# Altium PCB WC_Board_Backup2.PcbDoc
Units mil, origin at the board's own origin, x right, y up, seen from the top; angles counter-clockwise.
Board outline 3210 x 2580 mil, 2 copper layers (Top Layer, Bottom Layer); 45 components, 46 nets, 220 pads, 7 vias.
Unrouted connection lines stored in the file: 2.
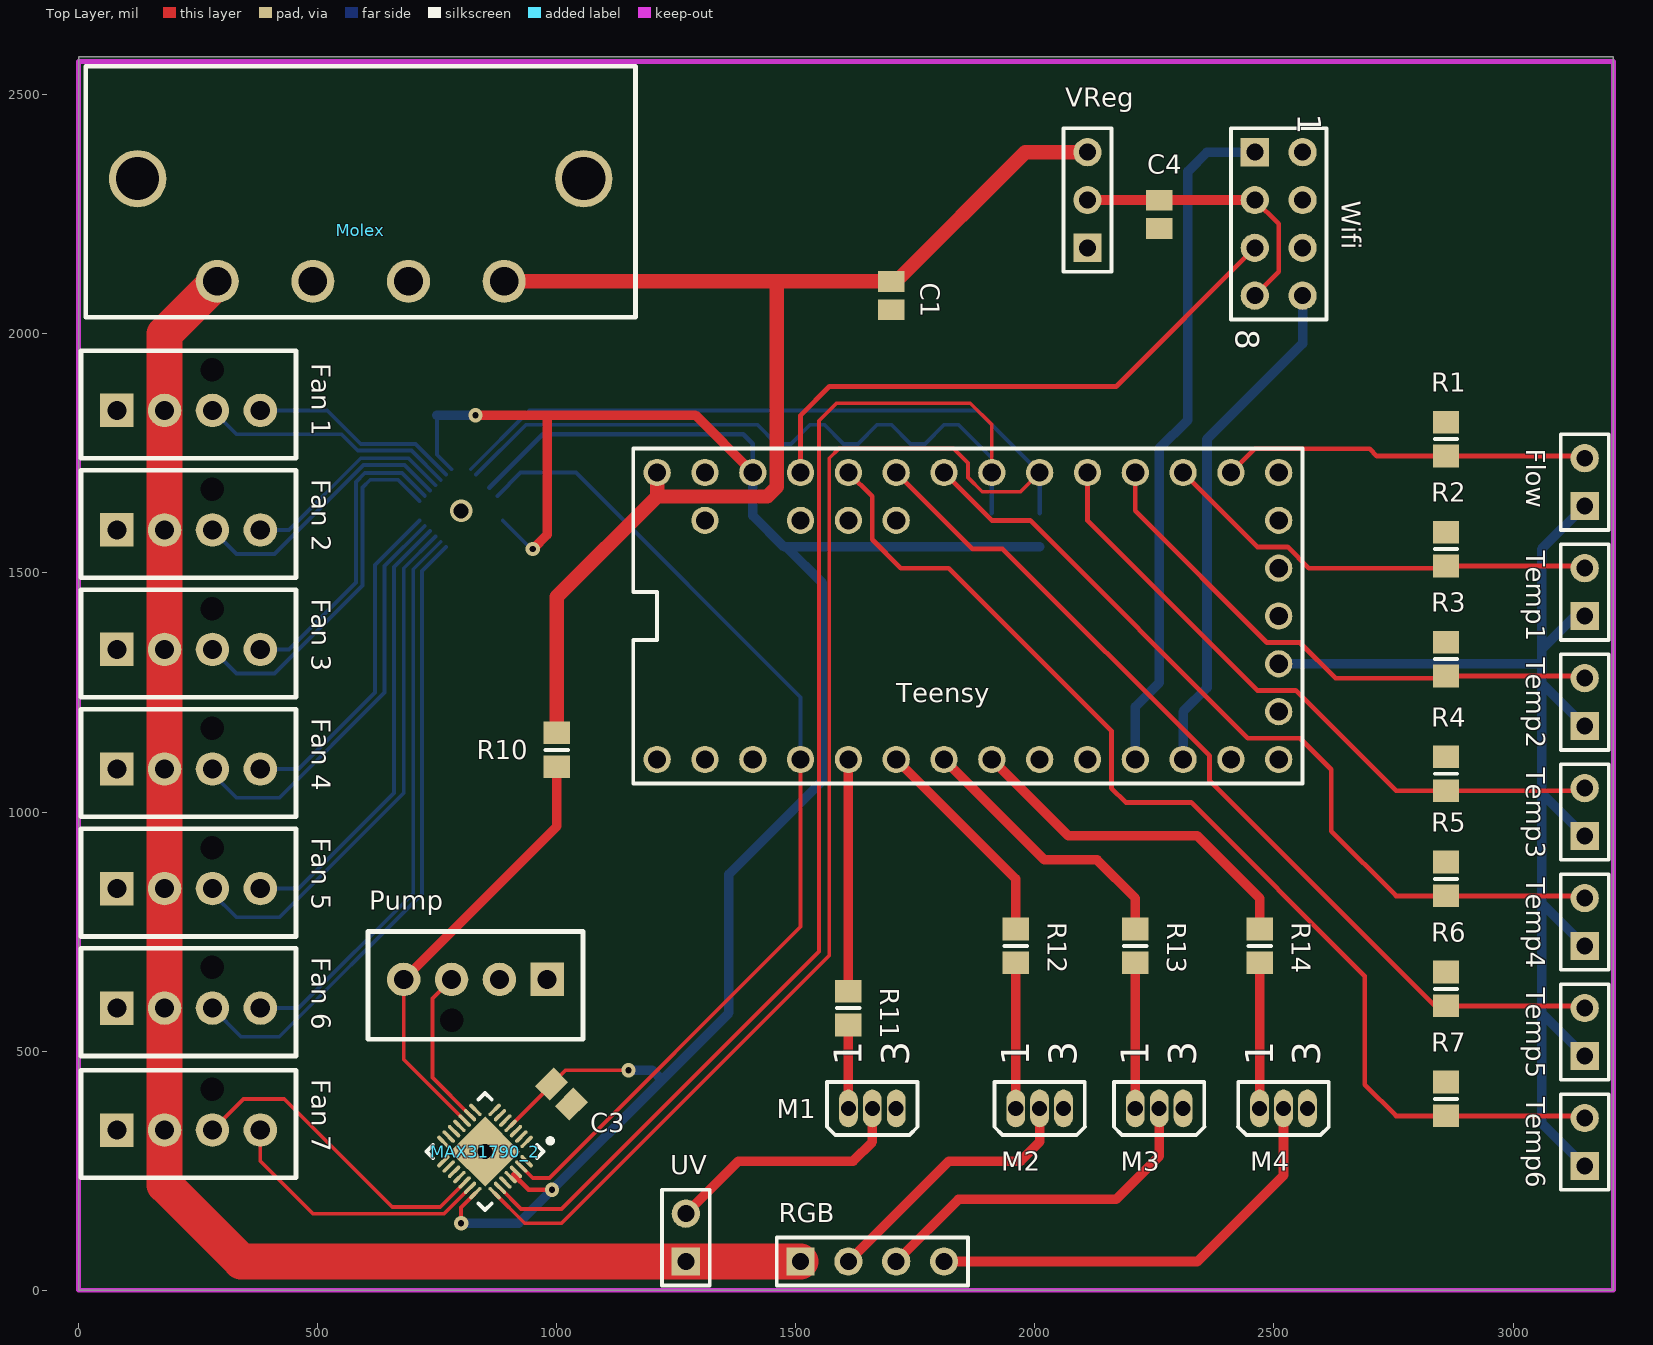
[diagram p0: Top Layer view]
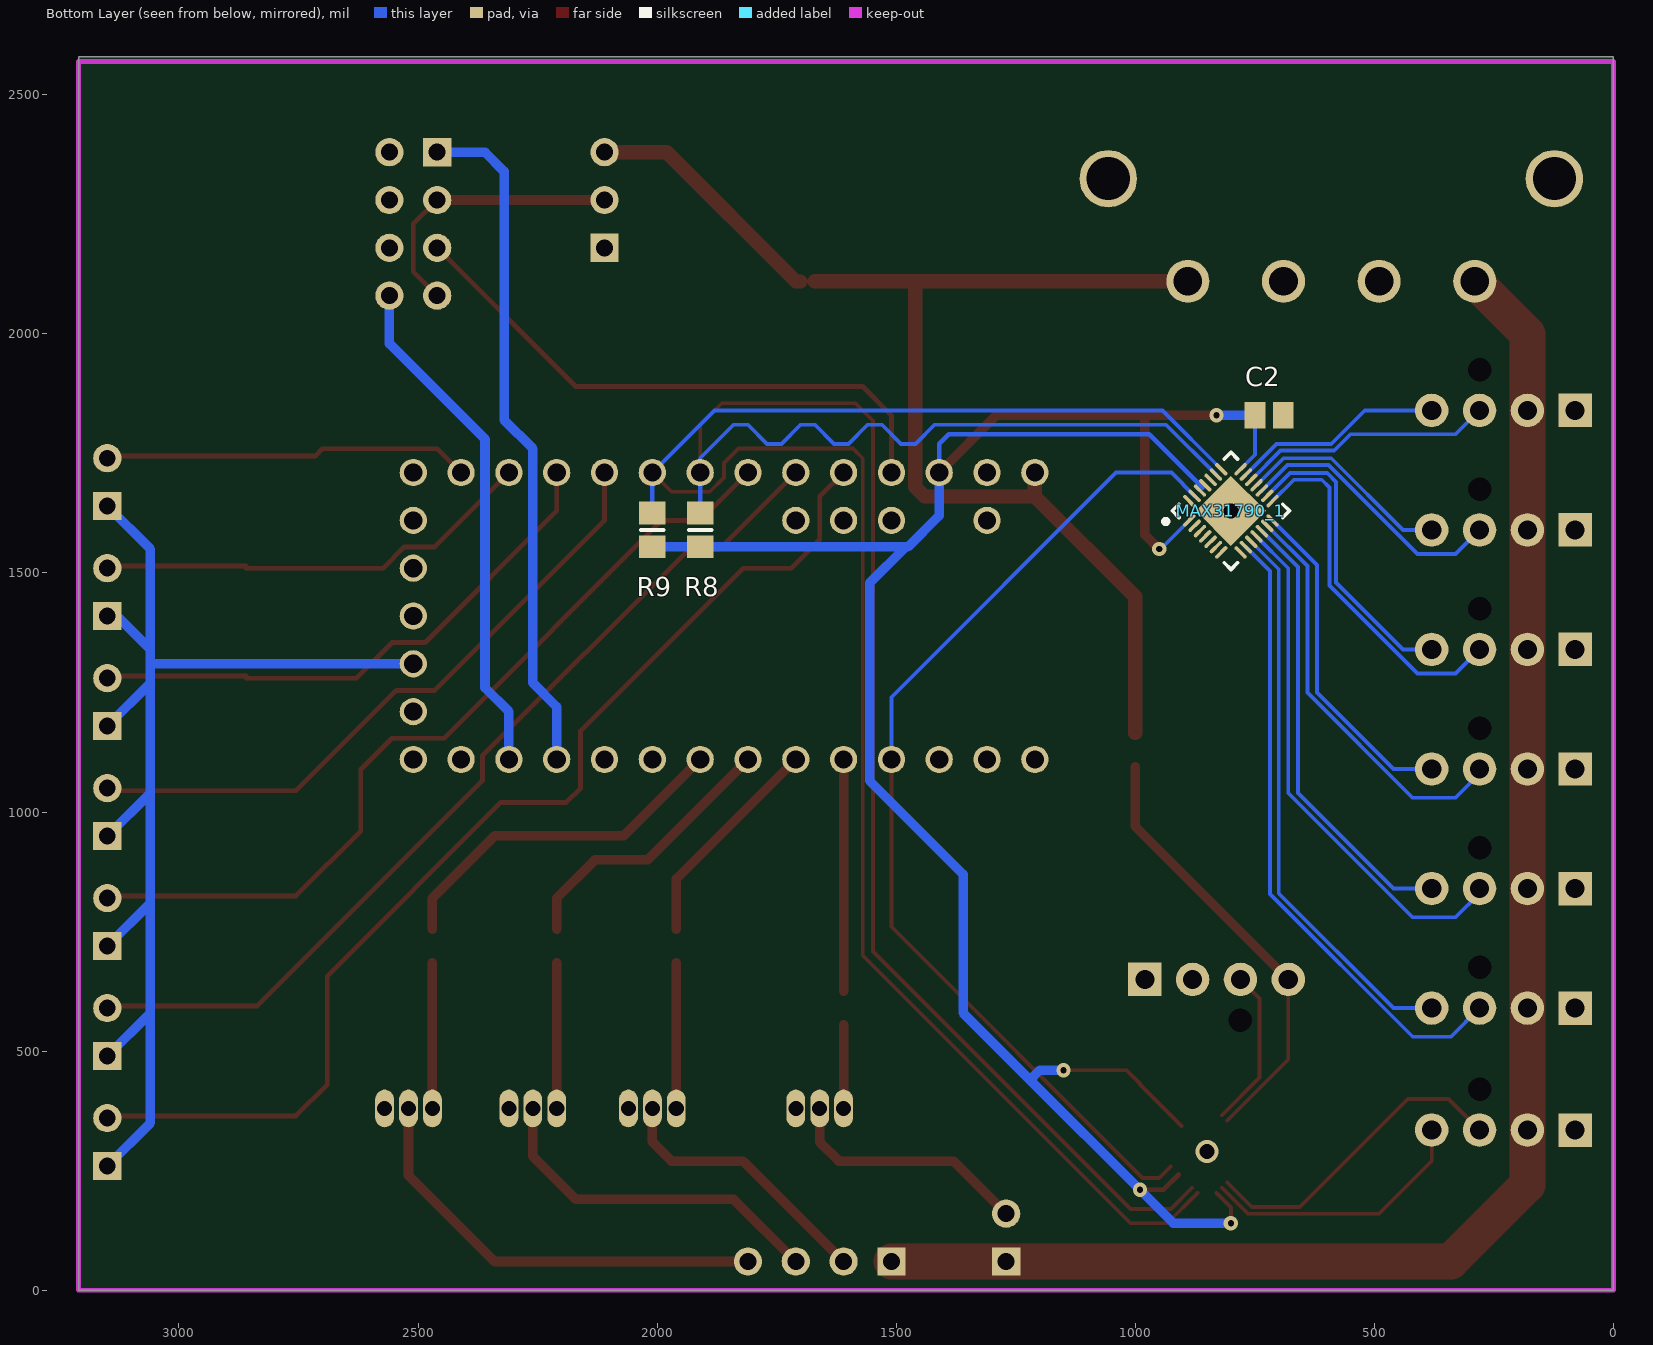
[diagram p1: Bottom Layer view, seen from below]

## Layer stack, top to bottom
Top Solder: solder mask 0.4, Solder Resist, Dk 3.5
Top Layer: signal copper 1.4
Dielectric1: dielectric 12.6, FR-4, Dk 4.8
Bottom Layer: signal copper 1.4
Bottom Solder: solder mask 0.4, Solder Resist, Dk 3.5

## Board outline
0,0 0,2580 3210,2580 3210,0

## Design rules (kind name [scope] priority, off if disabled: settings)
BoardOutlineClearance [All] p1: gap=15
Clearance [All] p1: gap=6
FabricationTestPointUsage TestPointUsage [All] p1: valid=0 allowmultiple=FALSE
FabricationTestpoint Testpoint [All] p1: side=3 testpointundercomponent=TRUE minsize=40 maxsize=100 preferedsize=60 minholesize=0 maxholesize=40 preferedholesize=32 testpointgrid=1 allowsidetop=TRUE allowsidebottom=TRUE usegrid=TRUE gridtolerance=0.01
HoleSize [All] p1: absolutevalues=TRUE maxlimit=100 minlimit=13 maxpercent=80.000 minpercent=20.000
MinimumAnnularRing [All] p1: minimumring=7
PolygonConnect [All] p1: connectstyle=Relief reliefconductorwidth=10 reliefentries=4 polygonreliefangle="90 Angle" airgapwidth=10
RoomDefinition WC_Board [InComponentClass('WC_Board')] p1: confinementstyle=ConfineIn formatcopy=TRUE lockcomponents=FALSE outline 0,0 3210,0 3210,2570 0,2570
RoutingVias [All] p1: holewidth=28 width=50 viastyle="Through Hole" minholewidth=13 minwidth=50 maxholewidth=28 maxwidth=50
SilkToSolderMaskClearance SilkscreenOverComponentPads [IsPad] p1: minsilkscreentomaskgap=10 clearancetoexposedcopper=TRUE
SolderMaskExpansion [All] p1: expansion=4
Width [All] p1: maxlimit=100 minlimit=6 preferedwidth=8
26 further rules are at their usual default settings.

## Components (designator, comment, footprint, x,y, rotation, side; value= is the part's Value field where it differs from the comment)
C1 "Cap Semi" C0805 1700,2080 r270 top
C2 "Cap Semi" C0805 720,1830 r180 bottom
C3 "Cap Semi" C0805 1010,410 r315 top
C4 "Cap Semi" C0805 2260,2250 r270 top
"Fan 1" "Fan 1" "Fan Header" 80,1840 r180 top
"Fan 2" "Fan 2" "Fan Header" 80,1590 r180 top
"Fan 3" "Fan 3" "Fan Header" 80,1340 r180 top
"Fan 4" "Fan 4" "Fan Header" 80,1090 r180 top
"Fan 5" "Fan 5" "Fan Header" 80,840 r180 top
"Fan 6" "Fan 6" "Fan Header" 80,590 r180 top
"Fan 7" "Fan 7" "Fan Header" 80,334.96 r180 top
Flow "Flow" HDR1X2 3150,1640 r90 top
M1 "MOSFET-N" E3 1660,380 r90 top (schematic designator UV_Mosfet)
M2 "MOSFET-N" E3 2010,380 r90 top (schematic designator RGB1)
M3 "MOSFET-N" E3 2260,380 r90 top (schematic designator RGB2)
M4 "MOSFET-N" E3 2520,380 r90 top (schematic designator RGB3)
MAX31790_1 "MAX31790" QFN40P400X400X80_HS-29N 800,1630 r135 bottom
MAX31790_2 "MAX31790" QFN40P400X400X80_HS-29N 850,290 r225 top
Molex "Molex" Molex 290,2110 r180 top
Pump "Pump" "Fan Header" 980,650 r0 top
R1 "Res3" 6-0805_N 2860,1780 r270 top
R2 "Res3" 6-0805_N 2860,1550 r270 top
R3 "Res3" 6-0805_N 2860,1320 r270 top
R4 "Res3" 6-0805_N 2860,1080 r270 top
R5 "Res3" 6-0805_N 2860,860 r270 top
R6 "Res3" 6-0805_N 2860,630 r270 top
R7 "Res3" 6-0805_N 2860,400 r270 top
R8 "Res3" 6-0805_N 1910,1590 r90 bottom
R9 "Res3" 6-0805_N 2010,1590 r90 bottom
R10 "Res3" 6-0805_N 1000,1130 r270 top
R11 "Res3" 6-0805_N 1610,590 r270 top
R12 "Res3" 6-0805_N 1960,720 r270 top
R13 "Res3" 6-0805_N 2210,720 r270 top
R14 "Res3" 6-0805_N 2470,720 r270 top
RGB "RGB" HDR1X4 1510,60 r0 top
Teensy "" TEENSY3-ALL_PINS 1860,1410 r90 top
Temp1 "Temp 1" HDR1X2 3150,1410 r90 top (schematic designator "Temp 1")
Temp2 "Temp 2" HDR1X2 3150,1180 r90 top (schematic designator "Temp 2")
Temp3 "Temp 3" HDR1X2 3150,950 r90 top (schematic designator "Temp 3")
Temp4 "Temp 4" HDR1X2 3150,720 r90 top (schematic designator "Temp 4")
Temp5 "Temp 5" HDR1X2 3150,490 r90 top (schematic designator "Temp 5")
Temp6 "Temp 6" HDR1X2 3150,260 r90 top (schematic designator "Temp 6")
UV "UV" HDR1X2 1270,60 r90 top
VReg "Header 3" HDR1X3 2110,2180 r90 top (schematic designator Vreg)
Wifi "Wifi" HDR2X4 2460,2380 r270 top

## Footprints (in the part's own frame and the unit in brackets; to place one, negate y for a bottom-side part, rotate by r counter-clockwise, add the part's x,y. Pads: shape width x height; smd on the part's side, far side on the other; paste and mask are expansions set on the pad)
6-0805_N [mm] "Chip Resistor, Body 2.0x1.2mm, IPC Medium Density"
  rect 1.2x1.4 smd: 1(-0.9,0) 2(0.9,0)
  silkscreen extent 0,-0.6 0,0.6, body extent -1.07,-0.7 1.07,0.7, height 0.7
C0805 [mm] "Chip Capacitor, Body 2.0x1.3mm, IPC High Density"
  rect 1.1x1.4 smd: 1(-0.75,0) 2(0.75,0)
  body extent -1.1,-0.72 1.1,0.72, height 1.4
E3 [mm] "TO, Flat Index; 3 In-Line, Axial Leads; Body Dia. 4.6mm; Lead Dia. 0.5 mm (max)"
  oval 2x1 hole 0.8: 1(0,1.27) 2(0,0) 3(0,-1.27)
  silkscreen extent -1.41,-2.41 1.41,2.41
"Fan Header" [mil] "4 Pin Fan Header"
  rect 70x70 hole 40: 1(0,0)
  round 70 hole 40: 2(-100,0) 3(-200,0) 4(-300,0)
  round 40 hole 49.21 unplated: 5(-200,-85.04)
  silkscreen extent -375,-125 75,100
HDR1X2 [mm] "Connector; Header; 2 Position"
  rect 1.5x1.5 hole 0.9: 1(0,0)
  round 1.5 hole 0.9: 2(2.54,0)
  silkscreen extent -1.27,-1.27 3.81,1.27
HDR1X3 [mm] "Connector; Header; 3 Position"
  rect 1.5x1.5 hole 0.9: 1(0,0)
  round 1.5 hole 0.9: 2(2.54,0) 3(5.08,0)
  silkscreen extent -1.27,-1.27 6.35,1.27
HDR1X4 [mm] "Connector; Header; 4 Position"
  rect 1.5x1.5 hole 0.9: 1(0,0)
  round 1.5 hole 0.9: 2(2.54,0) 3(5.08,0) 4(7.62,0)
  silkscreen extent -1.27,-1.27 8.89,1.27
HDR2X4 [mm] "Connector; Header; 4x2 Position"
  rect 1.5x1.5 hole 0.9: 1(0,0)
  round 1.5 hole 0.9: 2(0,2.54) 3(2.54,0) 4(2.54,2.54) 5(5.08,0) 6(5.08,2.54) 7(7.62,0) 8(7.62,2.54)
  silkscreen extent -1.27,-1.27 8.89,3.81
Molex [mil] "Molex Header"
  round 120 hole 90: 0(-766.54,-214.57) 0(166.54,-214.57)
  round 90 hole 60: 1(0,0) 2(-200,0) 3(-400,0) 4(-600,0)
  silkscreen extent -875,-450 275,75
QFN40P400X400X80_HS-29N [mm] "QFN, 28-Leads, Body 4.00x4.00mm, Pitch 0.40mm, Thermal Pad 2.64x2.64mm, IPC Medium Density"
  oval 0.85x0.2 smd: 1(-1.925,1.2) 2(-1.925,0.8) 3(-1.925,0.4) 4(-1.925,0) 5(-1.925,-0.4) 6(-1.925,-0.8) 7(-1.925,-1.2) 15(1.925,-1.2) 16(1.925,-0.8) 17(1.925,-0.4) 18(1.925,0) 19(1.925,0.4) 20(1.925,0.8) 21(1.925,1.2)
  oval 0.2x0.85 smd: 8(-1.2,-1.925) 9(-0.8,-1.925) 10(-0.4,-1.925) 11(0,-1.925) 12(0.4,-1.925) 13(0.8,-1.925) 14(1.2,-1.925) 22(1.2,1.925) 23(0.8,1.925) 24(0.4,1.925) 25(0,1.925) 26(-0.4,1.925) 27(-0.8,1.925) 28(-1.2,1.925)
  rect 2.64x2.64 smd: 29(0,0)
  silkscreen extent -2.97,-2.2 2.2,2.2, body extent -2.05,-2.05 2.05,2.05, height 0.8
TEENSY3-ALL_PINS [mil]
  round 57 hole 38: 0(-300,550) 1(-300,450) 2(-300,350) 3(-300,250) 3.3V(300,450) 3.3V1(-100,-650) 4(-300,150) 5(-300,50) 6(-300,-50) 7(-300,-150) 8(-300,-250) 9(-300,-350) 10(-300,-450) 11(-300,-550) 12(-300,-650) 13(300,-650) 14/A0(300,-550) 15/A1(300,-450) 16/A2(300,-350) 17/A3(300,-250) 18/A4(300,-150) 19/A5(300,-50) 20/A6(300,50) 21/A7(300,150) 22/A8(300,250) 23/A9(300,350) A10(200,250) A11(200,150) AGND(300,550) AREF(200,350) GND(-300,650) GND1(0,-650) PGM(100,-650) RESET/DAC(200,-650) VBAT(-200,-650) VIN(300,650) VUSB(200,550)
  silkscreen extent -350,-700 350,700

## Part data
C1 C2 C3 C4: "Capacitor (Semiconductor SIM Model)"
"Fan 1" "Fan 2" "Fan 3" "Fan 4" "Fan 5" "Fan 6" "Fan 7" Molex Pump: library part Component_1
Flow Temp1 Temp2 Temp3 Temp4 Temp5 Temp6 UV: library part "Header 2", "Header, 2-Pin"
M1 M2 M3 M4: "N-Channel MOSFET"
R1 R2 R3 R4 R5 R6 R7 R8 R9 R10 R11 R12 R13 R14: "Resistor"
RGB: library part "Header 4", "Header, 4-Pin"
Teensy: library part TEENSY_3.0_ALL_PINS
VReg: "Header, 3-Pin"
Wifi: library part "Header 4X2", "Header, 4-Pin, Dual row"

## Via types
v1: diameter 30, hole 13, Top Layer to Bottom Layer, 5 vias
v2: diameter 47.24, hole 31.5, Top Layer to Bottom Layer, 2 vias

## Nets (pads, with @x,y where several pads share a name; then routed paths per layer and width w, separated by ;. In a path a pad name is that pad's centre, name@x,y a point inside that pad or via, vN(x,y) a via of type N, cw(c..) or ccw(c..) an arc to the next point about the centre after c; other vN are vias at no path point)
3.3V: C2.1 C3.1 Flow.1 MAX31790_1.1 MAX31790_1.21 MAX31790_1.25 MAX31790_1.26 MAX31790_2.1 MAX31790_2.4 MAX31790_2.21 MAX31790_2.25 MAX31790_2.26 R8.1 R9.1 Teensy.3.3V Teensy.3.3V1 Temp1.1 Temp2.1 Temp3.1 Temp4.1 Temp5.1 Temp6.1 | length 7613.6
  Top Layer w8: v1(800,140) 800,173.19 MAX31790_2.21 ; MAX31790_2.4 989.12,429.12 C3.1 1018.24,460 v1(1150,460)
  Top Layer w10: 909.16,241.98 941.13,210 v1(990,210)
  Top Layer w20: v1(830,1830) 980,1830 ; v1(950,1550) 980,1580 980,1830 ; Teensy.3.3V 1290,1830 980,1830
  Bottom Layer w8: C2.1 749.53,1747.29 MAX31790_1.21 ; v1(830,1830) v1@830,1840 ; MAX31790_1.1 946.81,1550 v1(950,1550)
  Bottom Layer w10: 859.16,1678.02 971.14,1790 1390,1790 1410,1770 Teensy.3.3V
  Bottom Layer w20: C2.1 v1(830,1830) ; v1(800,140) 920,140 v1(990,210) 1220,440 ; v1(1150,460) 1200,460 1220,440 ; Teensy.3.3V 1410,1620 1475.43,1554.57 R8.1 R9.1 ; 1480,1554.57 1555.43,1479.13 1555.43,1065.43 1360,870 1360,580 1220,440 ; Teensy.3.3V1 3060,1310 ; Temp6.1 3060,350 3060,580 ; Temp5.1 3060,580 ; Temp4.1 3060,810 ; Temp3.1 3060,1040 ; Temp2.1 3060,1270 ; Temp1.1 3130,1410 3060,1340 ; Flow.1 3060,1550 3060,1340 ; 3060,580 3060,810 ; 3060,810 3060,1040 ; 3060,1040 3060,1270 ; 3060,1270 3060,1310 ; 3060,1310 3060,1340
3.3V_2: C4.1 VReg.2 Wifi.3 Wifi.7 | length 591.8
  Top Layer w10: Wifi.7 2510,2130 2510,2230 Wifi.3
  Top Layer w20: VReg.2 2259.53,2280 C4.1 2260.47,2280 Wifi.3
5V: C1.1 Molex.4 R10.1 Teensy.VIN VReg.3 | length 2631.9
  Top Layer w30: Molex.4 1460,2110 ; R10.1 1000,1450 1210,1660 ; Teensy.VIN@1210,1720 Teensy.VIN 1210,1660 ; 1670,2110 1460,2110 ; C1.1 1709.53,2109.53 1980,2380 VReg.3 ; 1210,1660 1440,1660 1460,1680 1460,2110
12V: "Fan 1.2" "Fan 2.2" "Fan 3.2" "Fan 4.2" "Fan 5.2" "Fan 6.2" "Fan 7.2" Molex.1 RGB.1 UV.1 | length 3331.8
  Top Layer w75: Molex.1 180,2000 180,1840 180,1590 180,1340 180,1090 180,840 180,590 180,334.96 180,220 340,60 UV.1 RGB.1
GND: "Fan 1.1" "Fan 2.1" "Fan 3.1" "Fan 4.1" "Fan 5.1" "Fan 6.1" "Fan 7.1" C1.2 C2.2 C3.2 C4.2 M1.3 M2.3 M3.3 M4.3 MAX31790_1.2 MAX31790_1.3 MAX31790_1.4 MAX31790_1.5 MAX31790_1.7 MAX31790_1.8 MAX31790_1.29 MAX31790_2.2 MAX31790_2.3 MAX31790_2.5 MAX31790_2.7 MAX31790_2.8 MAX31790_2.29 Molex.2 Molex.3 R1.1 R2.1 R3.1 R4.1 R5.1 R6.1 R7.1 Teensy.AGND Teensy.GND VReg.1 Wifi.2
  other v2: 850,290 800,1630
"NetFan 1_3": "Fan 1.3" MAX31790_1.19 | length 537.7
  Bottom Layer w8: 280,1840 330,1790 550,1790 584,1756 696.27,1756 MAX31790_1.19
"NetFan 1_4": "Fan 1.4" MAX31790_1.20 | length 444.2
  Bottom Layer w8: 380,1840 520,1840 590,1770 704.54,1770 MAX31790_1.20
"NetFan 2_3": "Fan 2.3" MAX31790_1.17 | length 575.2
  Bottom Layer w8: 280,1590 330,1540 409.8,1540 595.8,1726 681.73,1726 MAX31790_1.17
"NetFan 2_4": "Fan 2.4" MAX31790_1.18 | length 451.9
  Bottom Layer w8: 380,1590 440,1590 590,1740 690,1740 MAX31790_1.18
"NetFan 3_3": "Fan 3.3" MAX31790_1.15 | length 760.1
  Bottom Layer w8: 280,1340 330,1290 410,1290 594,1474 594,1678.97 610,1694.97 668.22,1694.97 MAX31790_1.15
"NetFan 3_4": "Fan 3.4" MAX31790_1.16 | length 640
  Bottom Layer w8: 380,1340 440,1340 580,1480 580,1690.4 598.56,1708.97 676.49,1708.97 MAX31790_1.16
"NetFan 4_3": "Fan 4.3" MAX31790_1.13 | length 865.4
  Bottom Layer w8: 280,1090 280,1080 330,1030 420,1030 640,1250 640,1514.54 MAX31790_1.13
"NetFan 4_4": "Fan 4.4" MAX31790_1.14 | length 704.6
  Bottom Layer w8: 380,1090 460,1090 620,1250 620,1516.81 MAX31790_1.14
"NetFan 5_3": "Fan 5.3" MAX31790_1.11 | length 1102.3
  Bottom Layer w8: 280,840 280,830 330,780 420,780 680,1040 680,1510 MAX31790_1.11
"NetFan 5_4": "Fan 5.4" MAX31790_1.12 | length 941.6
  Bottom Layer w8: 380,840 460,840 660,1040 660,1512.27 MAX31790_1.12
"NetFan 6_3": "Fan 6.3" MAX31790_1.9 | length 1333.3
  Bottom Layer w8: 280,590 340,530 419.8,530 718.35,828.55 718.35,1503.8 MAX31790_1.9
"NetFan 6_4": "Fan 6.4" MAX31790_1.10 | length 1178.5
  Bottom Layer w8: 380,590 460,590 700,830 700,1507.73 MAX31790_1.10
"NetFan 7_3": "Fan 7.3" MAX31790_2.19 | length 669.3
  Top Layer w8: 280,334.96 345.04,400 430,400 656,174 756.27,174 MAX31790_2.19
"NetFan 7_4": "Fan 7.4" MAX31790_2.20 | length 571.6
  Top Layer w8: 380,334.96 380,270 490,160 764.54,160 MAX31790_2.20
NetFlow_2: Flow.2 R1.2 Teensy.14/A0 | length 769
  Top Layer w10: Teensy.14/A0 2460,1760 2700,1760 2715.43,1744.57 R1.2 3145.43,1744.57 Flow.2
NetM1_1: M1.2 UV.2 | length 522.1
  Top Layer w20: UV.2 1380,270 1620,270 1660,310 M1.2
NetM1_2: M1.1 R11.2 | length 164.6
  Top Layer w20: M1.1@1610,390 R11.2
NetM2_1: M2.2 RGB.2 | length 573.6
  Top Layer w20: RGB.2 1820,270 1970,270 2010,310 M2.2
NetM2_2: M2.1 R12.2 | length 304.6
  Top Layer w20: M2.1 R12.2
NetM3_1: M3.2 RGB.3 | length 741.1
  Top Layer w20: RGB.3 1840,190 2170,190 2260,280 M3.2
NetM3_2: M3.1 R13.2 | length 304.6
  Top Layer w20: M3.1 R13.2
NetM4_1: M4.2 RGB.4 | length 924.6
  Top Layer w20: RGB.4 2340,60 2520,240 M4.2
NetM4_2: M4.1 R14.2 | length 304.6
  Top Layer w20: M4.1 R14.2
NetMAX31790_1_22: MAX31790_1.22 MAX31790_2.22 R9.2 Teensy.18/A4 | length 3906.8
  Top Layer w8: MAX31790_2.22 933.19,140 1010,140 1570,700 1570,1740 1590,1760 1830,1760 1860,1730 1860,1700 1890,1670 1970,1670 Teensy.18/A4 Teensy.18/A4@2010,1700
  Bottom Layer w8: MAX31790_1.22 943.19,1840 1880,1840 Teensy.18/A4
  Bottom Layer w10: R9.2 Teensy.18/A4
NetMAX31790_1_23: MAX31790_1.23 MAX31790_2.23 R8.2 Teensy.19/A5 | length 3878.6
  Top Layer w8: MAX31790_2.23 925.46,170 1010,170 1548.5,708.5 1548.5,1818.5 1585,1855 1865,1855 1910,1810 Teensy.19/A5
  Bottom Layer w8: MAX31790_1.23 935.46,1810 1420,1810 1460,1770 1490,1770 1530,1810 1560,1810 1600,1770 1630,1770 1670,1810 1700,1810 1740,1770 1770,1770 1810,1810 1840,1810 1910,1740 Teensy.19/A5
  Bottom Layer w10: R8.2 Teensy.19/A5
NetMAX31790_1_27: MAX31790_1.27 MAX31790_2.27 Teensy.2 | length 2140.6
  Top Layer w8: MAX31790_2.27 949.79,234.75 984.75,234.75 1510,760 Teensy.2
  Bottom Layer w8: MAX31790_1.27 924.54,1710 1040,1710 1510,1240 Teensy.2
NetMAX31790_2_9: MAX31790_2.9 Pump.3 | length 333.3
  Top Layer w8: Pump.3 740,610 740,444.54 MAX31790_2.9
NetMAX31790_2_10: MAX31790_2.10 Pump.4 R10.2 | length 925.2
  Top Layer w8: Pump.4 680,482.27 MAX31790_2.10
  Top Layer w20: Pump.4 1000,970 R10.2
NetR2_2: R2.2 Teensy.15/A1 Temp1.2 | length 924.7
  Top Layer w10: Teensy.15/A1 2465.5,1554.5 2528.43,1554.5 2572.93,1510 R2.2@2860,1510 ; R2.2 3145.43,1514.57 Temp1.2
NetR3_2: R3.2 Teensy.16/A2 Temp2.2 | length 1166.9
  Top Layer w10: Teensy.16/A2 2210,1630 2485.5,1354.5 2554.5,1354.5 2629,1280 R3.2@2860,1280 ; R3.2 3145.43,1284.57 Temp2.2
NetR4_2: R4.2 Teensy.17/A3 Temp3.2 | length 1376.5
  Top Layer w10: Teensy.17/A3 2110,1610 2465.5,1254.5 2545.5,1254.5 2755.43,1044.57 R4.2 3144.57,1044.57 Temp3.2
NetR5_2: R5.2 Teensy.20/A6 Temp4.2 | length 1784.2
  Top Layer w10: Teensy.20/A6 1910,1610 1990,1610 2445.5,1154.5 2554.5,1154.5 2620,1089 2620,960 2755.43,824.57 R5.2 3145.43,824.57 Temp4.2
NetR6_2: R6.2 Teensy.21/A7 Temp5.2 | length 1934.3
  Top Layer w10: Teensy.21/A7 1870,1550 1932.93,1550 2365.5,1117.43 2365.5,1065.5 2836.43,594.57 R6.2 3145.43,594.57 Temp5.2
NetR7_2: R7.2 Teensy.22/A8 Temp6.2 | length 2355.2
  Top Layer w10: Teensy.22/A8 1660,1660 1660,1570 1720,1510 1820,1510 2160,1170 2160,1050 2190,1020 2327.06,1020 2690,657.06 2690,430 2755.43,364.57 R7.2 3145.43,364.57 Temp6.2
NetR11_1: R11.1 Teensy.3 | length 484.6
  Top Layer w20: R11.1 Teensy.3
NetR12_1: R12.1 Teensy.4 | length 458.1
  Top Layer w20: Teensy.4 1960,860 R12.1
NetR13_1: R13.1 Teensy.5 | length 584.7
  Top Layer w20: Teensy.5 2020,900 2130,900 2210,820 R13.1
NetR14_1: R14.1 Teensy.6 | length 744.7
  Top Layer w20: Teensy.6 2070,950 2340,950 2470,820 R14.1
NetTeensy_9: Teensy.9 Wifi.1 | length 1432.1
  Bottom Layer w20: Teensy.9 2210,1220 2260,1270 2260,1760 2320,1820 2320,2340 2360,2380 Wifi.1
NetTeensy_10: Teensy.10 Wifi.8 | length 1073.6
  Bottom Layer w20: Teensy.10 2310,1210 2360,1260 2360,1780 2560,1980 Wifi.8
NetTeensy_23/A9: Teensy.23/A9 Wifi.5 | length 1215
  Top Layer w10: Teensy.23/A9 1510,1830 1570,1890 2170,1890 Wifi.5
pads on no net: "Fan 1.5" "Fan 2.5" "Fan 3.5" "Fan 4.5" "Fan 5.5" "Fan 6.5" "Fan 7.5" MAX31790_1.6 MAX31790_1.24 MAX31790_1.28 MAX31790_2.6 MAX31790_2.11 MAX31790_2.12 MAX31790_2.13 MAX31790_2.14 MAX31790_2.15 MAX31790_2.16 MAX31790_2.17 MAX31790_2.18 MAX31790_2.24 MAX31790_2.28 Molex.0 Pump.1 Pump.2 Pump.5 Teensy.0 Teensy.1 Teensy.7 Teensy.8 Teensy.11 Teensy.12 Teensy.13 Teensy.A10 Teensy.A11 Teensy.AREF Teensy.GND1 Teensy.PGM Teensy.RESET/DAC Teensy.VBAT Teensy.VUSB Wifi.4 Wifi.6

## Keep-outs
Keep-Out Layer:
  lines w10: 0,0 0,2570 3210,2570 3210,0 0,0

## Silkscreen, mask and mechanical layers (free items; w line width, h text height)
Mechanical 16:
  drawing of 1872 lines, arcs and shapes, not listed
  text "1" at -2853,4675 h70
  text "2" at 7,4675 h70
  text "3" at 2887,4675 h70
  text "4" at 5757,4675 h70
  text "A" at -4205,3769 h70
  text "A" at 7095,3769 h70
  text "B" at -4205,1877 h70
  text "B" at 7095,1877 h70
  text "C" at -4205,-33 h70
  text "ENGINEER:" at 2570,-1490 h45
  text "TITLE:" at 4070,-1490 h45
  text "PCB DESIGNER:" at 2570,-1785 h45
  text "D" at -4205,-1923 h70
  text "D" at 7095,-1923 h70
  text "DATE:" at 2570,-2090 h45
  text "PART NO.:" at 4070,-2090 h45
  text "REV:" at 6170,-2090 h45
  text "Altium Limited" at 1270,-2190 h70
  text ".PRINT_DATE" at 2620,-2210 h70
  text "12a Rodborough Rd" at 1270,-2290 h70
  text "Frenchs Forest" at 1270,-2390 h70
  text "FILE NAME:" at 2570,-2390 h45
  text "DWG NO:" at 4070,-2390 h45
  text "SCALE:" at 6170,-2390 h45
  text "NSW 2086" at 1270,-2490 h70
  text ".PCB_FILE_NAME_NO_PATH" at 2620,-2510 h70
  text "1" at -2853,-2725 h70
  text "2" at 7,-2725 h70
  text "3" at 2887,-2725 h70
  text "4" at 5757,-2725 h70

## Text inside footprints (layer, text, board x,y; h text height)
M1: Top Overlay "1" at 1638.15,469.57 h59.05 r90; Top Overlay "3" at 1737.28,469.57 h59.05 r90
M2: Top Overlay "1" at 1988.15,469.57 h59.05 r90; Top Overlay "3" at 2087.28,469.57 h59.05 r90
M3: Top Overlay "1" at 2238.15,469.57 h59.05 r90; Top Overlay "3" at 2337.28,469.57 h59.05 r90
M4: Top Overlay "1" at 2498.15,469.57 h59.05 r90; Top Overlay "3" at 2597.28,469.57 h59.05 r90
Wifi: Top Overlay "8" at 2420,2010 h50 r270; Top Overlay "1" at 2550,2460 h50 r270